# EAGLE board T06_preliminaryBoard_v1 (EAGLE 7.3.0)

Size 100 x 80 mm. Coordinates in mm from the lower left corner, seen from the top.
Outline: 0,0 100,0 100,80 0,80 0,0
Copper layers (1*16): Top 0.035mm / dielectric 1.5mm / Bottom 0.035mm
Design rules "default": minimum track width 10mil, minimum drill 24mil, track to track 8mil, track to pad 8mil, pad to pad 8mil, via to via 8mil, smd to smd 8mil, copper to edge 40mil, drill to drill 8mil, minimum pad ring 10mil, minimum via ring 8mil, stop-mask expansion 4mil, vias tented up to drill 0mil, thermal gap 10mil

## Footprints (pad centres in the part's own frame; a part is rotated, then mirrored left to right if it is on the bottom)
SSW-103-02-S-D = drill 1 pad 1.5 octagon: 1 -2.54,-1.27; 2 -2.54,1.27; 3 0,-1.27; 4 0,1.27; 5 2.54,-1.27; 6 2.54,1.27
C0805K = smd 1.1 x 1.4: 1 -1,0; 2 1,0
C1005 = smd 0.7 x 0.9: 1 -0.65,0; 2 0.65,0
CERM_OSC = drill 0.813 pad 1.676: P$1 -2.54,0; P$2 0,0; P$3 2.54,0
CHIPLED_0805 = smd 1.2 x 1.2: A 0,-1.05; C 0,1.05
CHIP-LED0805 = smd 1.2 x 1.2: A 0,-1.05; C 0,1.05
SSW-102-02-S-S = drill 1 pad 1.5 octagon: 1 -1.27,0; 2 1.27,0
SOT223 = smd 1.499 x 2.007: 1 -2.261,-3.15; 2 0.025,-3.15; 3 2.311,-3.15 | smd 3.81 x 2.007: 4 0,3.15
TO-92 = drill 0.813 pad 1.88: 1 -1.27,0; 2 0,1.905; 3 1.27,0
R0603 = smd 1 x 1.1: 1 -0.85,0; 2 0.85,0
SSW-104-02-S-S = drill 1 pad 1.5 octagon: 1 -3.81,0; 2 -1.27,0; 3 1.27,0; 4 3.81,0
MPB1 = drill 1.321 octagon: 1 -5.08,0; 1@1 5.08,0
DIL28-3 = drill 0.813 long: 1 -16.51,-3.81; 2 -13.97,-3.81; 3 -11.43,-3.81; 4 -8.89,-3.81; 5 -6.35,-3.81; 6 -3.81,-3.81; 7 -1.27,-3.81; 8 1.27,-3.81; 9 3.81,-3.81; 10 6.35,-3.81; 11 8.89,-3.81; 12 11.43,-3.81; 13 13.97,-3.81; 14 16.51,-3.81; 15 16.51,3.81; 16 13.97,3.81; 17 11.43,3.81; 18 8.89,3.81; 19 6.35,3.81; 20 3.81,3.81; 21 1.27,3.81; 22 -1.27,3.81; 23 -3.81,3.81; 24 -6.35,3.81; 25 -8.89,3.81; 26 -11.43,3.81; 27 -13.97,3.81; 28 -16.51,3.81
TAC-SWITCH-PTH = drill 1.016 pad 1.524 long: 1 -3.251,2.261; 2 3.251,2.261; 3 -3.251,-2.261; 4 3.251,-2.261
SSW-105-02-S-S = drill 1 pad 1.5 octagon: 1 -5.08,0; 2 -2.54,0; 3 0,0; 4 2.54,0; 5 5.08,0

## Placement (x,y rotation side)
AVR  SSW-103-02-S-D  [SSW-103-02-S-D]  48.26,72.39 270 top
C1  10u  [C0805K]  16.51,27.94 0 top
C2  10u  [C0805K]  16.51,24.13 0 top
C3  100n  [C1005]  16.51,31.75 0 top
C4  10u  [C0805K]  16.51,20.32 0 top
C5  10u  [C0805K]  16.51,16.51 0 top
C6  100n  [C1005]  11.43,31.75 180 top
CSTCE16M0V53-R0  16M  [CERM_OSC]  73.66,29.21 90 top
LED1  LTST-C171GKT  [CHIPLED_0805]  5.08,72.39 90 top
LED2  LTST-C171GKT  [CHIP-LED0805]  35.56,63.5 90 top
LED3  LTST-C170KFKT  [CHIP-LED0805]  72.39,2.54 90 top
MOTOR1  SSW-102-02-S-S  [SSW-102-02-S-S]  76.2,77.47 180 top
MOTOR2  SSW-102-02-S-S  [SSW-102-02-S-S]  86.36,77.47 180 top
NCP1117DT33T5GOSTR-ND  REG1117  [SOT223]  34.29,72.39 180 top
NCP1117DT50RKGOSTR-ND  REG1117  [SOT223]  24.13,72.39 180 top
POWER  SSW-102-02-S-S  [SSW-102-02-S-S]  5.08,77.47 180 top
Q3  2n3904  [TO-92]  6.35,26.67 90 top
R1  1M  [R0603]  80.01,29.21 0 top
R2  10K  [R0603]  11.43,21.59 0 top
R3  220  [R0603]  16.51,12.7 0 top
R4  500  [R0603]  16.51,8.89 0 top
R5  100  [R0603]  16.51,34.29 0 top
R6  220  [R0603]  16.51,38.1 0 top
R7  220  [R0603]  16.51,41.91 0 top
SONAR1  SSW-104-02-S-S  [SSW-104-02-S-S]  96.52,72.39 90 top
SONAR2  SSW-104-02-S-S  [SSW-104-02-S-S]  96.52,57.15 90 top
SONAR3  SSW-104-02-S-S  [SSW-104-02-S-S]  96.52,41.91 90 top
TP1  MPB1  [MPB1]  29.21,17.78 0 top
TP2  MPB1  [MPB1]  29.21,13.97 0 top
TP3  MPB1  [MPB1]  29.21,10.16 0 top
TP4  MPB1  [MPB1]  29.21,6.35 0 top
TP5  MPB1  [MPB1]  29.21,2.54 0 top
TP6  MPB1  [MPB1]  64.77,15.24 0 top
TP7  MPB1  [MPB1]  64.77,19.05 0 top
TP8  MPB1  [MPB1]  64.77,22.86 0 top
TP9  MPB1  [MPB1]  29.21,27.94 0 top
TP10  MPB1  [MPB1]  29.21,57.15 0 top
TP13  MPB1  [MPB1]  7.62,16.51 0 top
TP14  MPB1  [MPB1]  64.77,33.02 0 top
TP15  MPB1  [MPB1]  64.77,40.64 0 top
TP16  MPB1  [MPB1]  64.77,45.72 0 top
TP17  MPB1  [MPB1]  64.77,50.8 0 top
TP18  MPB1  [MPB1]  29.21,41.91 0 top
TP19  MPB1  [MPB1]  29.21,38.1 0 top
TP20  MPB1  [MPB1]  64.77,36.83 0 top
TP21  MPB1  [MPB1]  29.21,33.02 0 top
TP22  MPB1  [MPB1]  29.21,22.86 0 top
TP23  MPB1  [MPB1]  29.21,46.99 0 top
TP24  MPB1  [MPB1]  64.77,7.62 0 top
TP25  MPB1  [MPB1]  64.77,11.43 0 top
TP26  MPB1  [MPB1]  29.21,52.07 0 top
TP27  MPB1  [MPB1]  7.62,6.35 0 top
TP28  MPB1  [MPB1]  7.62,11.43 0 top
U1  ATMEGA328P_PDIP  [DIL28-3]  49.53,24.13 90 top
U$2  TACTILE-SWITCH-PTH  [TAC-SWITCH-PTH]  87.63,5.08 0 top
X1  SSW-105-02-S-S  [SSW-105-02-S-S]  96.52,15.24 90 top
X2  SSW-102-02-S-S  [SSW-102-02-S-S]  96.52,27.94 90 top

## Library data of the parts
AVR = con-samtec; MPN: SSW-103-02-S-D; OC_FARNELL: unknown; OC_NEWARK: 11P9365
C1 C2 C4 C5 CSTCE16M0V53-R0 LED1-LED3 = adafruit
C3 C6 = eagle-ltspice; SPICEMODEL: NONE; SPICEPREFIX: C
MOTOR1 MOTOR2 POWER X2 = con-samtec; MPN: SSW-102-02-S-S; OC_FARNELL: unknown; OC_NEWARK: 11P9351
NCP1117DT33T5GOSTR-ND NCP1117DT50RKGOSTR-ND = burr-brown; MPN: REG1117; OC_FARNELL: 1097566; OC_NEWARK: 14P6981
Q3 = SparkFun-DiscreteSemi; PROD_ID: TRANS-08447
R1-R7 = eagle-ltspice; SPICEMODEL: NONE; SPICEPREFIX: R
SONAR1-SONAR3 = con-samtec; MPN: SSW-104-02-S-S; OC_FARNELL: unknown; OC_NEWARK: 11P9384
TP1-TP10 TP13-TP28 = con-hirschmann; MF: FARNELL; MPN: MPB1 BLACK; OC_FARNELL: unknown; OC_NEWARK: 06WX5859
U1 = SparkFun-DigitalIC
U$2 = GeekAmmo
X1 = con-samtec; MPN: SSW-105-02-S-S; OC_FARNELL: unknown; OC_NEWARK: 11P9399

## Nets
+3V3: C4.1 NCP1117DT33T5GOSTR-ND.2 R5.2 TP10.1 TP10.1@1
+5V: AVR.1 C1.1 C3.1 C6.1 NCP1117DT50RKGOSTR-ND.2 R2.2 R3.1 SONAR1.4 SONAR2.4 SONAR3.4 TP9.1 TP9.1@1 U1.7 U1.20 X2.2
+9V: C2.1 C5.1 NCP1117DT33T5GOSTR-ND.3 NCP1117DT50RKGOSTR-ND.3 POWER.1 R6.1 TP26.1 TP26.1@1
BU0: TP25.1 TP25.1@1 U1.2 X1.1
BU1: TP24.1 TP24.1@1 U1.3 X1.2
BU2: TP6.1 TP6.1@1 U1.4 X1.3
BU3: TP7.1 TP7.1@1 U1.5 X1.4
BU4: TP8.1 TP8.1@1 U1.6 X1.5
D16: TP19.1 TP19.1@1 U1.16
ECHO1: SONAR1.2 TP14.1 TP14.1@1 U1.11
ECHO2: SONAR2.2 TP15.1 TP15.1@1 U1.12
ECHO3: SONAR3.2 TP16.1 TP16.1@1 U1.13
GND: AVR.5 C1.2 C2.2 C3.2 C4.2 C5.2 C6.2 CSTCE16M0V53-R0.P$2 LED1.C LED2.C LED3.C NCP1117DT33T5GOSTR-ND.1 NCP1117DT50RKGOSTR-ND.1 POWER.2 Q3.1 SONAR1.1 SONAR2.1 SONAR3.1 U1.8 U1.22 U$2.1 X2.1
MISO: AVR.6 TP21.1 TP21.1@1 U1.18
MOSI: AVR.3 TP20.1 TP20.1@1 U1.17
MOTOR: R4.1 TP17.1 TP17.1@1 U1.14
N$1: CSTCE16M0V53-R0.P$3 R1.1 U1.10
N$2: CSTCE16M0V53-R0.P$1 R1.2 U1.9
N$3: TP23.1 TP23.1@1 U1.23
N$4: TP1.1 TP1.1@1 U1.24
N$5: MOTOR1.1 MOTOR2.1 R5.1
N$6: TP2.1 TP2.1@1 U1.25
N$7: LED1.A R6.2
N$8: LED2.A R3.2
N$9: LED3.A R7.2
N$10: Q3.2 R4.2
N$11: MOTOR1.2 MOTOR2.2 Q3.3 TP13.1 TP13.1@1
N$15: TP3.1 TP3.1@1 U1.26
N$16: TP4.1 TP4.1@1 U1.27
N$17: TP5.1 TP5.1@1 U1.28
RESET: AVR.2 R2.1 R7.1 TP27.1 TP27.1@1 TP28.1 TP28.1@1 U1.1 U$2.3
SCK: AVR.4 TP22.1 TP22.1@1 U1.19
TRIG: SONAR1.3 SONAR2.3 SONAR3.3 TP18.1 TP18.1@1 U1.15

## Tracks (layer width: path | path; a pad name or v marks a point on that pad's centre or on a via)
+3V3  (4 unrouted)
+5V  (14 unrouted)
+9V  (7 unrouted)
BU0  (3 unrouted)
BU1  (3 unrouted)
BU2  (3 unrouted)
BU3  (3 unrouted)
BU4  (3 unrouted)
D16  (2 unrouted)
ECHO1  (3 unrouted)
ECHO2  (3 unrouted)
ECHO3  (3 unrouted)
GND  (21 unrouted)
MISO  (3 unrouted)
MOSI  (3 unrouted)
MOTOR  (3 unrouted)
N$1  (2 unrouted)
N$2  (2 unrouted)
N$3  (2 unrouted)
N$4  (2 unrouted)
N$5  (2 unrouted)
N$6  (2 unrouted)
N$7  (1 unrouted)
N$8  (1 unrouted)
N$9  (1 unrouted)
N$10  (1 unrouted)
N$11  (4 unrouted)
N$15  (2 unrouted)
N$16  (2 unrouted)
N$17  (2 unrouted)
RESET  (8 unrouted)
SCK  (3 unrouted)
TRIG  (5 unrouted)